# Altium PCB DIOT_Sampler 20spacin.PCBDOC (part 8 of 8)
Units mm, origin at the board's own origin, x right, y up, seen from the top; angles counter-clockwise.
Board outline 222.37 x 100 mm, 4 copper layers (Top, GP1(GND), L3, Bot), stack 1.648 mm thick; 680 components, 424 nets, 2212 pads, 808 vias.
Unrouted connection lines stored in the file: 327.
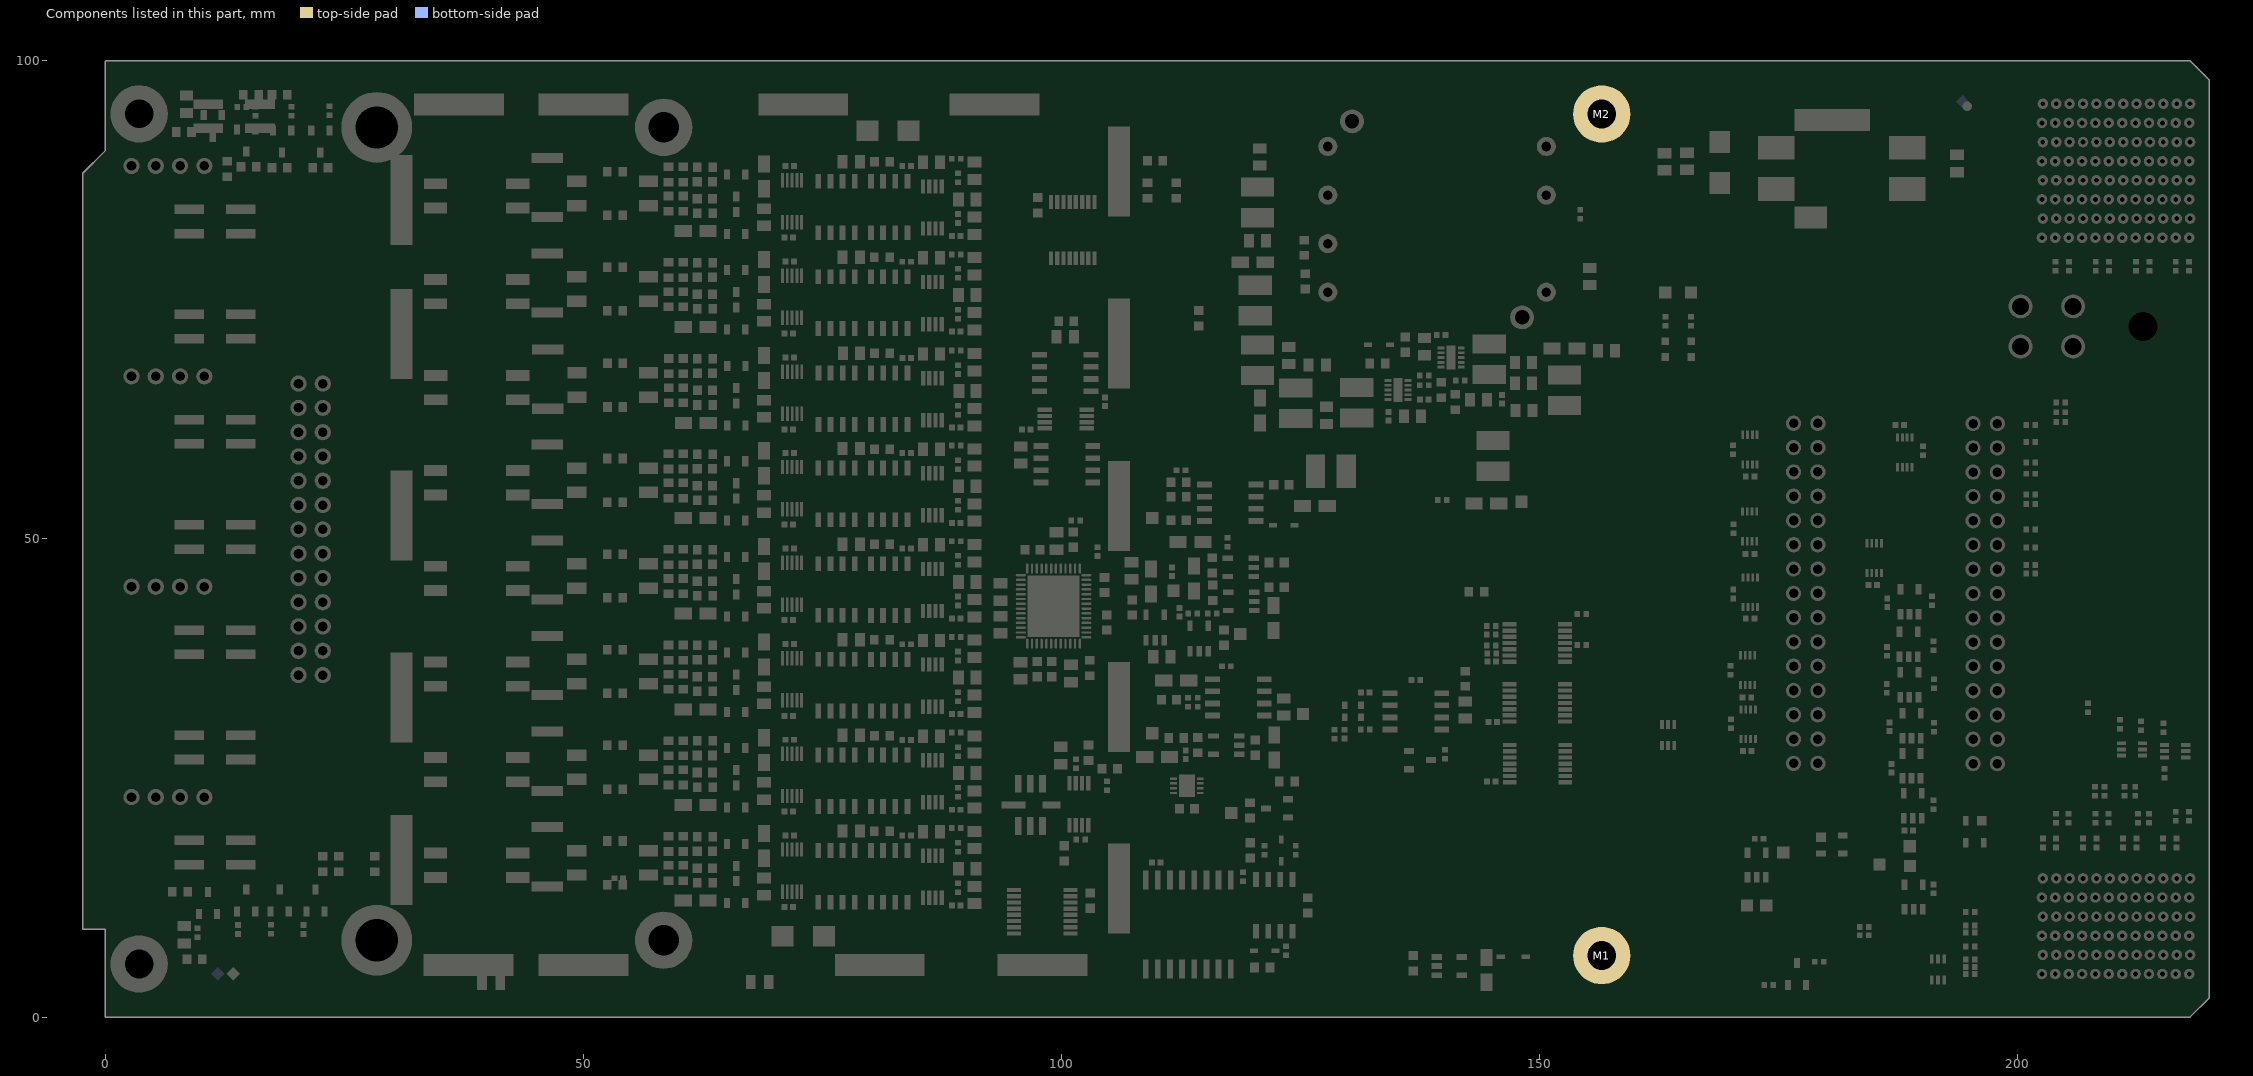
[diagram p9: the components of this part, seen from the top]

## Silkscreen, mask and mechanical layers (free items; w line width, h text height) (continued)
M1 Board Shape:
  drawing of 307 lines, arcs and shapes, not listed
  text "Layer" at 8.908,138.136 h1.52
  text "Name" at 19.319,138.136 h1.52
  text "Material" at 41.411,138.136 h1.52
  text "Thickness" at 63.249,138.136 h1.52
  text "Constant" at 79.755,138.136 h1.52
  text "Board Layer Stack" at 94.23,138.136 h1.52
  text "TopOverlay" at 19.319,135.088 h1.52
  text "TopSolder" at 19.319,132.04 h1.52
  text "Solder Resist" at 41.411,132.04 h1.52
  text "0,40mil" at 63.249,132.04 h1.52
  text "3.5" at 79.755,132.04 h1.52
  text "1" at 8.908,128.992 h1.52
  text "Top" at 19.319,128.992 h1.52
  text "2,28mil" at 63.249,128.992 h1.52
  text "Dielectric1" at 19.319,125.944 h1.52
  text "FR-4" at 41.411,125.944 h1.52
  text "7,09mil" at 63.249,125.944 h1.52
  text "4.8" at 79.755,125.944 h1.52
  text "2" at 8.908,122.896 h1.52
  text "GP1(GND)" at 19.319,122.896 h1.52
  text "1,42mil" at 63.249,122.896 h1.52
  text "Dielectric 3" at 19.319,119.848 h1.52
  text "43,31mil" at 63.249,119.848 h1.52
  text "4.2" at 79.755,119.848 h1.52
  text "3" at 8.908,116.8 h1.52
  text "L3" at 19.319,116.8 h1.52
  text "1,42mil" at 63.249,116.8 h1.52
  text "Dielectric2" at 19.319,113.752 h1.52
  text "FR-4" at 41.411,113.752 h1.52
  text "7,09mil" at 63.249,113.752 h1.52
  text "4.2" at 79.755,113.752 h1.52
  text "4" at 8.908,110.704 h1.52
  text "Bot" at 19.319,110.704 h1.52
  text "2,28mil" at 63.249,110.704 h1.52
  text "BottomSolder" at 19.319,107.656 h1.52
  text "Solder Resist" at 41.411,107.656 h1.52
  text "0,40mil" at 63.249,107.656 h1.52
  text "3.5" at 79.755,107.656 h1.52
  text "All vias must be fileld with resin and capped with copper" at 48.708,107.096 h3
  text "BottomOverlay" at 19.319,104.608 h1.52
M2 Old Board Shape:
  lines w0.1: -2.544,-14.238 -2.544,108.444
Mechanical4:
  lines w1: 31.014,5.43 31.014,95.43 106.014,95.43 106.014,5.43 31.014,5.43 ; 117.014,59.43 117.014,94.43 157.014,94.43 157.014,59.43 117.014,59.43
Mechanical13:
  lines w0.01: -2.782,-0.784 -2.782,80.924
DrillDrawing:
  rectangle: 115.114,65.93 117.014,66.605

## Text inside footprints (layer, text, board x,y; h text height)
J1: TopOverlay "30" at 199.279,27.135 h1.02 r270; Mechanical14 "30" at 199.279,27.135 h1.02 r270
J2: TopOverlay "30" at 180.509,27.161 h1.02 r270; Mechanical14 "30" at 180.509,27.161 h1.02 r270
J3: TopOverlay "26" at 18.833,65.605 h1.02 r90; Mechanical14 "26" at 18.833,65.605 h1.02 r90
J8: DrillDrawing "PRESS-FIT TECHNOLOGY" at 218.689,17 h1 r180; DrillDrawing "Diam. 0.5mm +/-0.05" at 218.689,18.5 h1 r180; TopOverlay "A" at 218.439,1.3 h1 r90; TopOverlay "B" at 217.039,1.3 h1 r90; TopOverlay "C" at 215.639,1.3 h1 r90; TopOverlay "D" at 214.239,2.3 h1 r90; TopOverlay "E" at 212.839,2.3 h1 r90; TopOverlay "F" at 211.439,2.3 h1 r90; TopOverlay "G" at 210.039,2.3 h1 r90; TopOverlay "H" at 208.639,2.3 h1 r90; TopOverlay "I" at 207.239,2.55 h1 r90; TopOverlay "J" at 205.839,2.3 h1 r90; TopOverlay "K" at 204.439,2.3 h1 r90; TopOverlay "L" at 203.039,2.3 h1 r90; TopOverlay "1" at 197.989,4.15 h1 r90; TopOverlay "2" at 197.989,6.15 h1 r90; TopOverlay "3" at 197.989,8.15 h1 r90; TopOverlay "4" at 197.989,10.15 h1 r90; TopOverlay "5" at 197.989,12.15 h1 r90; TopOverlay "6" at 197.989,14.15 h1 r90; Mechanical14 "A" at 218.439,1.3 h1 r90; Mechanical14 "B" at 217.039,1.3 h1 r90; Mechanical14 "C" at 215.639,1.3 h1 r90; Mechanical14 "D" at 214.239,2.3 h1 r90; Mechanical14 "E" at 212.839,2.3 h1 r90; Mechanical14 "F" at 211.439,2.3 h1 r90; Mechanical14 "G" at 210.039,2.3 h1 r90; Mechanical14 "H" at 208.639,2.3 h1 r90; Mechanical14 "I" at 207.239,2.55 h1 r90; Mechanical14 "J" at 205.839,2.3 h1 r90; Mechanical14 "K" at 204.439,2.3 h1 r90; Mechanical14 "L" at 203.039,2.3 h1 r90; Mechanical14 "1" at 197.989,4.15 h1 r90; Mechanical14 "2" at 197.989,6.15 h1 r90; Mechanical14 "3" at 197.989,8.15 h1 r90; Mechanical14 "4" at 197.989,10.15 h1 r90; Mechanical14 "5" at 197.989,12.15 h1 r90; Mechanical14 "6" at 197.989,14.15 h1 r90; Mechanical8 "Top Surface of Mother Board" at 232.289,5.125 h0.5 r90; Mechanical8 "Edge of Daugher Card" at 220.789,6.275 h0.5 r90
J9: DrillDrawing "Diam. 0.5mm +/-0.05" at 218.689,99.5 h1 r180; DrillDrawing "PRESS-FIT TECHNOLOGY" at 218.689,98 h1 r180; TopOverlay "7" at 197.989,93.15 h1 r90; TopOverlay "8" at 197.989,95.15 h1 r90; TopOverlay "6" at 197.989,91.15 h1 r90; TopOverlay "5" at 197.989,89.15 h1 r90; TopOverlay "4" at 197.989,87.15 h1 r90; TopOverlay "3" at 197.989,85.15 h1 r90; TopOverlay "2" at 197.989,83.15 h1 r90; TopOverlay "1" at 197.989,81.15 h1 r90; TopOverlay "L" at 203.039,79.3 h1 r90; TopOverlay "K" at 204.439,79.3 h1 r90; TopOverlay "J" at 205.839,79.3 h1 r90; TopOverlay "I" at 207.239,79.55 h1 r90; TopOverlay "H" at 208.639,79.3 h1 r90; TopOverlay "G" at 210.039,79.3 h1 r90; TopOverlay "F" at 211.439,79.3 h1 r90; TopOverlay "E" at 212.839,79.3 h1 r90; TopOverlay "D" at 214.239,79.3 h1 r90; TopOverlay "C" at 215.639,78.3 h1 r90; TopOverlay "B" at 217.039,78.3 h1 r90; TopOverlay "A" at 218.439,78.3 h1 r90; Mechanical14 "7" at 197.989,93.15 h1 r90; Mechanical14 "8" at 197.989,95.15 h1 r90; Mechanical14 "6" at 197.989,91.15 h1 r90; Mechanical14 "5" at 197.989,89.15 h1 r90; Mechanical14 "4" at 197.989,87.15 h1 r90; Mechanical14 "3" at 197.989,85.15 h1 r90; Mechanical14 "2" at 197.989,83.15 h1 r90; Mechanical14 "1" at 197.989,81.15 h1 r90; Mechanical14 "L" at 203.039,79.3 h1 r90; Mechanical14 "K" at 204.439,79.3 h1 r90; Mechanical14 "J" at 205.839,79.3 h1 r90; Mechanical14 "I" at 207.239,79.55 h1 r90; Mechanical14 "H" at 208.639,79.3 h1 r90; Mechanical14 "G" at 210.039,79.3 h1 r90; Mechanical14 "F" at 211.439,79.3 h1 r90; Mechanical14 "E" at 212.839,79.3 h1 r90; Mechanical14 "D" at 214.239,79.3 h1 r90; Mechanical14 "C" at 215.639,78.3 h1 r90; Mechanical14 "B" at 217.039,78.3 h1 r90; Mechanical14 "A" at 218.439,78.3 h1 r90; Mechanical8 "Edge of Daugher Card" at 220.789,85.275 h0.5 r90; Mechanical8 "Top Surface of Mother Board" at 232.289,84.125 h0.5 r90
J10: TopOverlay "1" at 204.855,76.692 h1.2 r270; Mechanical14 "1" at 204.855,76.692 h1.2 r270